# EAGLE board CT_schematic (EAGLE 7.6.0)

Size 100 x 80 mm. Coordinates in mm from the lower left corner, seen from the top.
Outline: 0,0 100,0 100,80 0,80 0,0
Copper layers (1*16): Top 0.035mm / dielectric 1.5mm / Bottom 0.035mm
Design rules "default": minimum track width 10mil, minimum drill 24mil, track to track 8mil, track to pad 8mil, pad to pad 8mil, via to via 8mil, smd to smd 8mil, copper to edge 40mil, drill to drill 8mil, minimum pad ring 10mil, minimum via ring 8mil, stop-mask expansion 4mil, vias tented up to drill 0mil, thermal gap 10mil

## Footprints (pad centres in the part's own frame; a part is rotated, then mirrored left to right if it is on the bottom)
C0603 = smd 0.8 x 0.8: 1 -0.762,0; 2 0.762,0
C0402 = smd 0.5 x 0.5: 1 -0.508,0; 2 0.508,0
C0805 = smd 1.2 x 1.3: 1 -1.016,0; 2 1.016,0
C1210 = smd 1.2 x 2.5: 1 -1.524,0; 2 1.524,0
R0603 = smd 0.8 x 0.8: 1 -0.762,0; 2 0.762,0
EXV-9H = smd 3.505 x 1.676: 1 -2.857,0; 2 2.857,0
L0603 = smd 0.8 x 0.8: 1 -0.762,0; 2 0.762,0
IND25X25CZ = smd 2.489 x 3.429: 1 -2.718,0; 2 2.718,0
PJ-037B_PACKAGE = drill 3.7 square: 1 12,0 | drill 3.2 square: 2 6,0
LQFP48 = smd 0.3 x 1.2: 1 -2.75,-4.25; 2 -2.25,-4.25; 3 -1.75,-4.25; 4 -1.25,-4.25; 5 -0.75,-4.25; 6 -0.25,-4.25; 7 0.25,-4.25; 8 0.75,-4.25; 9 1.25,-4.25; 10 1.75,-4.25; 11 2.25,-4.25; 12 2.75,-4.25; 25 2.75,4.25; 26 2.25,4.25; 27 1.75,4.25; 28 1.25,4.25; 29 0.75,4.25; 30 0.25,4.25; 31 -0.25,4.25; 32 -0.75,4.25; 33 -1.25,4.25; 34 -1.75,4.25; 35 -2.25,4.25; 36 -2.75,4.25 | smd 1.2 x 0.3: 13 4.25,-2.75; 14 4.25,-2.25; 15 4.25,-1.75; 16 4.25,-1.25; 17 4.25,-0.75; 18 4.25,-0.25; 19 4.25,0.25; 20 4.25,0.75; 21 4.25,1.25; 22 4.25,1.75; 23 4.25,2.25; 24 4.25,2.75; 37 -4.25,2.75; 38 -4.25,2.25; 39 -4.25,1.75; 40 -4.25,1.25; 41 -4.25,0.75; 42 -4.25,0.25; 43 -4.25,-0.25; 44 -4.25,-0.75; 45 -4.25,-1.25; 46 -4.25,-1.75; 47 -4.25,-2.25; 48 -4.25,-2.75
SOIC-8 = smd 1.6 x 0.6: 1 -2.7,1.905 | smd 1.55 x 0.6: 2 -2.7,0.635; 3 -2.7,-0.635; 4 -2.7,-1.905; 5 2.7,-1.905; 6 2.7,-0.635; 7 2.7,0.635; 8 2.7,1.905
SSOP-28 = smd 1.5 x 0.4: 1 -3.625,4.225; 2 -3.625,3.575; 3 -3.625,2.925; 4 -3.625,2.275; 5 -3.625,1.625; 6 -3.625,0.975; 7 -3.625,0.325; 8 -3.625,-0.325; 9 -3.625,-0.975; 10 -3.625,-1.625; 11 -3.625,-2.275; 12 -3.625,-2.925; 13 -3.625,-3.575; 14 -3.625,-4.225; 15 3.625,-4.225; 16 3.625,-3.575; 17 3.625,-2.925; 18 3.625,-2.275; 19 3.625,-1.625; 20 3.625,-0.975; 21 3.625,-0.325; 22 3.625,0.325; 23 3.625,0.975; 24 3.625,1.625; 25 3.625,2.275; 26 3.625,2.925; 27 3.625,3.575; 28 3.625,4.225
FCI_10118193-0001LF = smd 0.4 x 1.35: 1 -1.3,2.675; 2 -0.65,2.675; 3 0,2.675; 4 0.65,2.675; 5 1.3,2.675 | smd 1.6 x 1.4: 6 -3.2,2.45; 7 3.2,2.45 | smd 1.9 x 1.9: 8 -1.2,0; 9 1.2,0 | hole 0.5: -3.3,0; 3.3,0
SAMTEC_FTSH-105-01-L-DV-K = smd 0.762 x 2.794: 1 -2.54,-2.032; 2 -2.54,2.032; 3 -1.27,-2.032; 4 -1.27,2.032; 5 0,-2.032; 6 0,2.032; 7 1.27,-2.032; 8 1.27,2.032; 9 2.54,-2.032; 10 2.54,2.032
ABLS-25.000MHZ-B2F-T = smd 5.6 x 2.8: 1 -3.81,0; 2 5.69,0
ABLS-12.000MHZ-B4-T = smd 5.6 x 2.8: 1 0,0; 2 9.5,0
ASEK = smd 1.4 x 1: 1 -1.1,-0.8; 2 1.1,-0.8; 3 1.1,0.8; 4 -1.1,0.8
IR3899MTR1PBF = smd 0.25 x 0.75: 1 0,0; 2 0.5,0; 3 1,0; 4 1.5,0; 5 2,0; 6 2.5,0; 7 3,0 | smd 0.75 x 0.25: 8 3.425,0.78; 9 3.425,1.28; 10 3.425,1.78; 14 -0.425,1.78; 15 -0.425,1.28; 16 -0.425,0.78 | smd 0.3 x 1.95: 11 3.22,3.63 | smd 1.62 x 2.42: 12 1.786,3.8 | smd 1 x 1.95: 13 0.117,3.63 | smd 2.19 x 1.25: 17 1.51,1.26
SON-6 = smd 0.55 x 0.3: 1 -0.355,0.5 | smd 0.52 x 0.3: 2 -0.37,0; 3 -0.37,-0.5; 4 0.37,-0.5; 5 0.37,0; 6 0.37,0.5
SW_4-1437565-2 = smd 1.4 x 2.1: 1 -2.23,4.55; 2 -2.23,-4.55; 3 2.23,4.55; 4 2.23,-4.55
LGM67K-G1J2-24-Z = smd 0.8 x 1.4: A -2,0; C 0,0
NC7SZ125M5X = smd 1.3 x 0.7: 1 -1.3,0.95; 2 -1.3,0; 3 -1.3,-0.95; 4 1.3,-0.95; 5 1.3,0.95

## Placement (x,y rotation side)
C1  1e-06  [C0603]  -67.31,60.96 0 top  (outside the outline)
C2  1e-07  [C0603]  -71.12,60.96 0 top  (outside the outline)
C3  1e-07  [C0603]  -15.24,66.04 0 top  (outside the outline)
C4  1e-07  [C0603]  -19.05,66.04 0 top  (outside the outline)
C5  4.7e-06  [C0603]  -59.69,60.96 0 top  (outside the outline)
C6  1e-07  [C0603]  -22.86,66.04 0 top  (outside the outline)
C7  1e-07  [C0603]  -26.67,66.04 0 top  (outside the outline)
C8  1e-08  [C0603]  -30.48,66.04 0 top  (outside the outline)
C9  1e-06  [C0603]  -34.29,66.04 0 top  (outside the outline)
C10  1e-11  [C0402]  -19.05,71.12 0 top  (outside the outline)
C11  1e-11  [C0402]  -22.86,71.12 0 top  (outside the outline)
C12  1e-08  [C0402]  -26.67,71.12 0 top  (outside the outline)
C13  1e-07  [C0402]  -30.48,71.12 0 top  (outside the outline)
C14  4.7e-06  [C0805]  -46.99,48.26 0 top  (outside the outline)
C15  1e-07  [C0402]  -34.29,71.12 0 top  (outside the outline)
C16  1e-07  [C0402]  -38.1,71.12 0 top  (outside the outline)
C17  1e-07  [C0402]  -41.91,71.12 0 top  (outside the outline)
C18  1e-08  [C0402]  -45.72,71.12 0 top  (outside the outline)
C19  0.0001  [C1210]  -29.21,49.53 0 top  (outside the outline)
C20  2.2e-06  [C0603]  -63.5,60.96 0 top  (outside the outline)
C21  1e-07  [C0402]  -49.53,71.12 0 top  (outside the outline)
C22  1e-07  [C0402]  -53.34,71.12 0 top  (outside the outline)
C23  8.2e-09  [C0402]  -15.24,71.12 0 top  (outside the outline)
C24  2.724074888439e-07  [R0603]  -57.15,48.26 0 top  (outside the outline)
C27  1e-07  [C0402]  -57.15,71.12 0 top  (outside the outline)
C28  0.0001  [EXV-9H]  -64.77,31.75 0 top  (outside the outline)
C29  0.0001  [EXV-9H]  -17.78,41.91 0 top  (outside the outline)
C30  1e-08  [C0402]  -60.96,71.12 0 top  (outside the outline)
C31  1e-08  [C0402]  -64.77,71.12 0 top  (outside the outline)
F1  240.0  [L0603]  -38.1,66.04 0 top  (outside the outline)
I1  6.8e-07  [IND25X25CZ]  -68.58,41.91 0 top  (outside the outline)
J1  PJ-037B  [PJ-037B_PACKAGE]  -71.12,7.62 0 top  (outside the outline)
R1  10000.0  [R0603]  -49.53,55.88 0 top  (outside the outline)
R2  1000.0  [R0603]  -41.91,66.04 0 top  (outside the outline)
R3  1600.5  [R0603]  -45.72,66.04 0 top  (outside the outline)
R4  4700.0  [R0603]  -49.53,66.04 0 top  (outside the outline)
R5  10000.0  [R0603]  -54.61,55.88 0 top  (outside the outline)
R6  10000.0  [R0603]  -59.69,55.88 0 top  (outside the outline)
R7  10000.0  [R0603]  -64.77,55.88 0 top  (outside the outline)
R8  10000.0  [R0603]  -69.85,55.88 0 top  (outside the outline)
R9  4700.0  [R0603]  -53.34,66.04 0 top  (outside the outline)
R10  10000.0  [R0603]  -15.24,60.96 0 top  (outside the outline)
R11  10000.0  [R0603]  -20.32,60.96 0 top  (outside the outline)
R12  10000.0  [R0603]  -25.4,60.96 0 top  (outside the outline)
R13  10000.0  [R0603]  -30.48,60.96 0 top  (outside the outline)
R14  10000.0  [R0603]  -35.56,60.96 0 top  (outside the outline)
R15  5.0  [R0603]  -57.15,66.04 0 top  (outside the outline)
R16  0.1  [R0603]  -60.96,66.04 0 top  (outside the outline)
R17  4030.2416170974  [R0603]  -64.77,48.26 0 top  (outside the outline)
R18  719.68600305311  [R0603]  -19.05,55.88 0 top  (outside the outline)
R19  63.795609756098  [R0603]  -26.67,55.88 0 top  (outside the outline)
R20  130.0  [R0603]  -64.77,66.04 0 top  (outside the outline)
R21  39000.0  [R0603]  -40.64,60.96 0 top  (outside the outline)
R22  49900.0  [R0603]  -45.72,60.96 0 top  (outside the outline)
R23  5286.7027027027  [R0603]  -34.29,55.88 0 top  (outside the outline)
R24  10000.0  [R0603]  -50.8,60.96 0 top  (outside the outline)
R25  10000.0  [R0603]  -55.88,60.96 0 top  (outside the outline)
R26  9100.0  [R0603]  -68.58,66.04 0 top  (outside the outline)
R27  680000.0  [R0603]  -39.37,55.88 0 top  (outside the outline)
R28  120000.0  [R0603]  -44.45,55.88 0 top  (outside the outline)
U1  stm32f091cct6  [LQFP48]  -57.15,20.32 0 top  (outside the outline)
U2  AT25010B-SSHL-T  [SOIC-8]  -24.13,33.02 0 top  (outside the outline)
U3  FT232RL-REEL  [SSOP-28]  -20.32,7.62 0 top  (outside the outline)
U4  10118193-0001LF  [FCI_10118193-0001LF]  -34.29,31.75 0 top  (outside the outline)
U5  FTSH-105-01-L-DV-K  [SAMTEC_FTSH-105-01-L-DV-K]  -49.53,7.62 0 top  (outside the outline)
U6  ABLS-25.000MHZ-B2F-T  [ABLS-25.000MHZ-B2F-T]  -36.83,41.91 0 top  (outside the outline)
U7  ABLS-12.000MHZ-B4-T  [ABLS-12.000MHZ-B4-T]  -60.96,41.91 0 top  (outside the outline)
U8  ASEK-32.768KHz-ECST  [ASEK]  -55.88,31.75 0 top  (outside the outline)
U9  IR3899MTR1PBF  [IR3899MTR1PBF]  -44.45,17.78 0 top  (outside the outline)
U10  TPS3895ADRYR  [SON-6]  -67.31,69.85 0 top  (outside the outline)
U11  4-1437565-2  [SW_4-1437565-2]  -27.94,21.59 0 top  (outside the outline)
U12  Q65110A2395  [LGM67K-G1J2-24-Z]  -17.78,49.53 0 top  (outside the outline)
U13  nc7sz125m5x  [NC7SZ125M5X]  -34.29,48.26 0 top  (outside the outline)
U14  nc7sz125m5x  [NC7SZ125M5X]  -40.64,48.26 0 top  (outside the outline)

## Library data of the parts
C1-C24 C27-C31 F1 I1 J1 R1-R28 U1-U14 = circuit_tree

## Nets
CLK_CRYSTAL_U1_5: C10.1 U1.5 U6.1
CLK_CRYSTAL_U1_6: C11.1 U1.6 U6.2
CLK_CRYSTAL_U3_27: U3.27 U7.1
CLK_CRYSTAL_U3_28: U3.28 U7.2
CLK_U1_3: U1.3 U8.3
GND: C1.2 C2.2 C3.2 C4.2 C5.2 C6.2 C7.2 C8.2 C9.2 C10.2 C11.2 C12.2 C13.2 C14.2 C15.2 C16.2 C17.2 C18.2 C20.2 C21.2 C22.2 C27.2 C28.2 C29.2 C30.2 C31.2 J1.2 R2.2 R5.2 R11.2 R15.2 R16.1 R16.2 R18.2 R21.2 R23.2 R26.2 R28.2 U1.8 U1.23 U1.35 U1.47 U2.4 U3.7 U3.18 U3.21 U3.25 U3.26 U4.5 U4.6 U4.7 U4.8 U4.9 U5.3 U5.5 U8.2 U9.4 U9.11 U9.17 U10.2 U12.C U13.2 U13.3 U14.1 U14.3
NET_U1_7: R4.1 U1.7 U14.4
NET_U1_9: C8.1 C9.1 F1.1 U1.9
NET_U1_44: R5.1 U1.44
NET_U1_45: R3.1 U1.45 U12.A
NET_U1_46: R1.1 U1.46 U11.3 U11.4
NET_U2_3: R6.1 U2.3
NET_U2_7: R8.1 U2.7
NET_U3_14: R10.1 U3.14
NET_U3_17: C15.1 U3.17
NET_U3_19: R11.1 U3.19
NET_U4_1: R9.1 U4.1
NET_U4_2: U3.16 U4.2
NET_U4_3: U3.15 U4.3
NET_U4_19: R9.2
NET_U5_9: R15.1 U5.9
NET_U9_1: C23.1 R17.1 R18.1 R19.1 R20.1 U9.1 U9.8
NET_U9_2: C22.1 U9.2
NET_U9_3: C23.2 C24.1 C24.2 U9.3
NET_U9_5: R21.1 U9.5
NET_U9_10: C20.1 U9.10
NET_U9_12: C19.1 I1.1 U9.12
NET_U9_13: U9.13
NET_U9_14: C19.2 U9.14
NET_U9_15: R22.1 R23.1 U9.15
NET_U9_ATNET_3: I1.2 R17.2
NET_U9_ATNET_4: C24.2 R19.2
NET_U9_ATNET_5: R20.2
NET_U10_1: R25.1 R26.1 U10.1
NET_U10_3: R27.2 R28.1 U10.3
NET_U10_4: R24.1 U10.4 U13.4 U14.2
NET_U11_1: R2.1 U11.1 U11.2
PROC_SPI1_MISO: U1.16 U2.2
PROC_SPI1_MOSI: U1.17 U2.5
PROC_SPI1_NSS: R7.1 U1.14 U2.1
PROC_SPI1_SCK: U1.15 U2.6
PROC_SYS_SWCLK: R13.1 U1.37 U5.4
PROC_SYS_SWDIO: R14.1 U1.34 U5.2
PROC_USART1_CTS: U1.32 U3.3
PROC_USART1_RTS: U1.33 U3.11
PROC_USART1_RX: U1.31 U3.1
PROC_USART1_TX: U1.30 U3.5
RST_OUT_U5_JTAG_RST_B: R12.1 U5.10 U13.1
VCC_S1_16V4: C21.1 C28.1 C29.1 J1.1 R22.2 U9.9
VCC_TIER1_3V3: C1.1 C2.1 C3.1 C4.1 C5.1 C6.1 C7.1 C12.1 C13.1 C14.1 C16.1 C17.1 C18.1 C27.1 C30.1 C31.1 F1.2 I1.2 R1.2 R3.2 R4.2 R6.2 R7.2 R8.2 R10.2 R12.2 R13.2 R14.2 R17.2 R24.2 R25.2 R27.1 U1.1 U1.24 U1.36 U1.48 U2.8 U3.4 U3.20 U5.1 U8.4 U10.6 U13.5 U14.5

## Tracks (layer width: path | path; a pad name or v marks a point on that pad's centre or on a via)
CLK_CRYSTAL_U1_5  (2 unrouted)
CLK_CRYSTAL_U1_6  (2 unrouted)
CLK_CRYSTAL_U3_27  (1 unrouted)
CLK_CRYSTAL_U3_28  (1 unrouted)
CLK_U1_3  (1 unrouted)
GND  (64 unrouted)
NET_U1_7  (2 unrouted)
NET_U1_9  (3 unrouted)
NET_U1_44  (1 unrouted)
NET_U1_45  (2 unrouted)
NET_U1_46  (3 unrouted)
NET_U2_3  (1 unrouted)
NET_U2_7  (1 unrouted)
NET_U3_14  (1 unrouted)
NET_U3_17  (1 unrouted)
NET_U3_19  (1 unrouted)
NET_U4_1  (1 unrouted)
NET_U4_2  (1 unrouted)
NET_U4_3  (1 unrouted)
NET_U5_9  (1 unrouted)
NET_U9_1  (6 unrouted)
NET_U9_2  (1 unrouted)
NET_U9_3  (3 unrouted)
NET_U9_5  (1 unrouted)
NET_U9_10  (1 unrouted)
NET_U9_12  (2 unrouted)
NET_U9_14  (1 unrouted)
NET_U9_15  (2 unrouted)
NET_U9_ATNET_3  (1 unrouted)
NET_U9_ATNET_4  (1 unrouted)
NET_U10_1  (2 unrouted)
NET_U10_3  (2 unrouted)
NET_U10_4  (3 unrouted)
NET_U11_1  (2 unrouted)
PROC_SPI1_MISO  (1 unrouted)
PROC_SPI1_MOSI  (1 unrouted)
PROC_SPI1_NSS  (2 unrouted)
PROC_SPI1_SCK  (1 unrouted)
PROC_SYS_SWCLK  (2 unrouted)
PROC_SYS_SWDIO  (2 unrouted)
PROC_USART1_CTS  (1 unrouted)
PROC_USART1_RTS  (1 unrouted)
PROC_USART1_RX  (1 unrouted)
PROC_USART1_TX  (1 unrouted)
RST_OUT_U5_JTAG_RST_B  (2 unrouted)
VCC_S1_16V4  (5 unrouted)
VCC_TIER1_3V3  (43 unrouted)